# EAGLE board chargerDischarger.V6 (EAGLE 9.5.1)
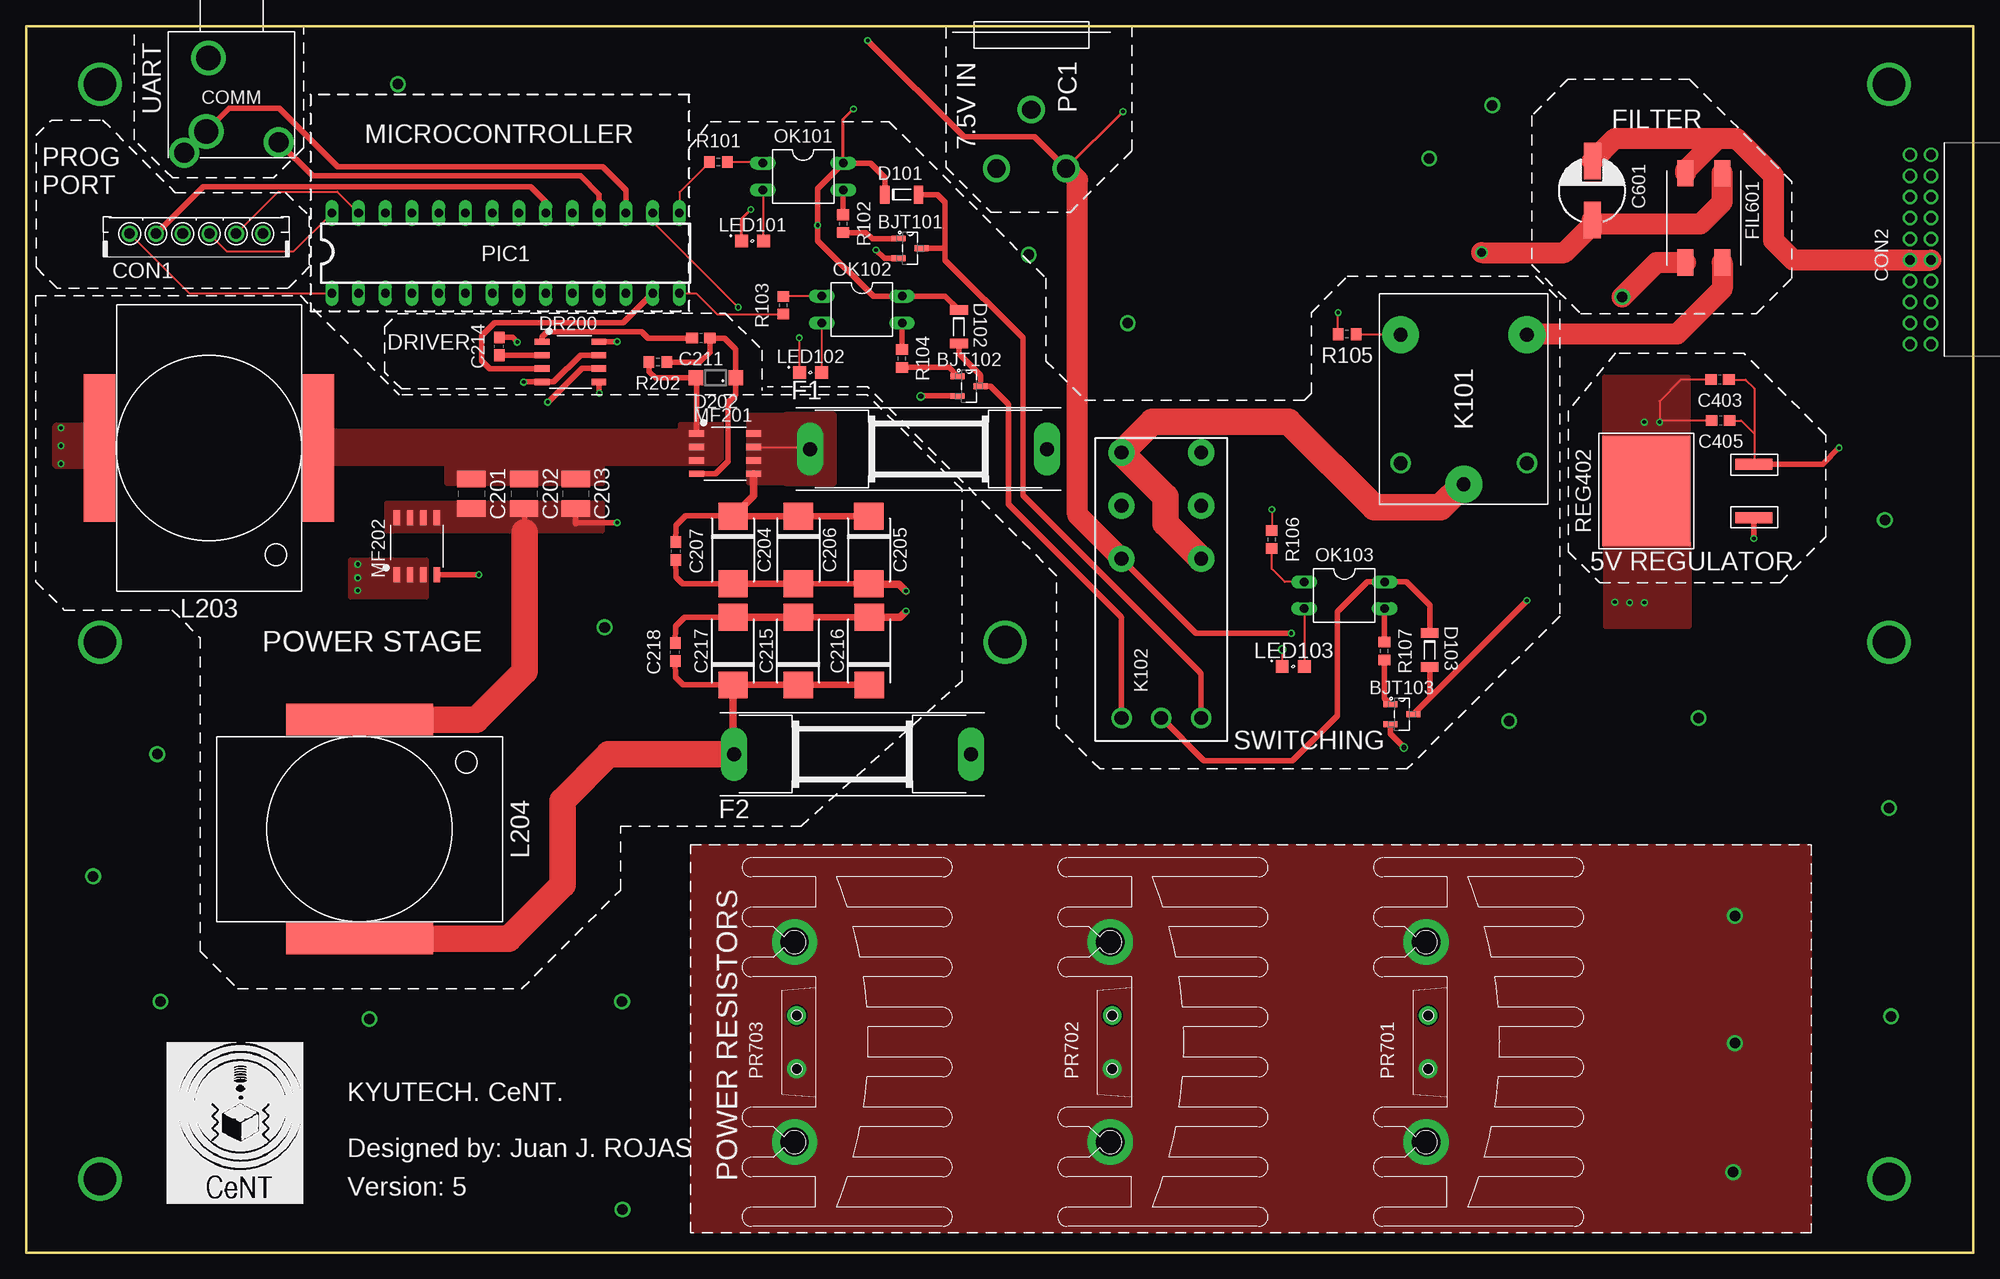
[diagram p0: board, top side]
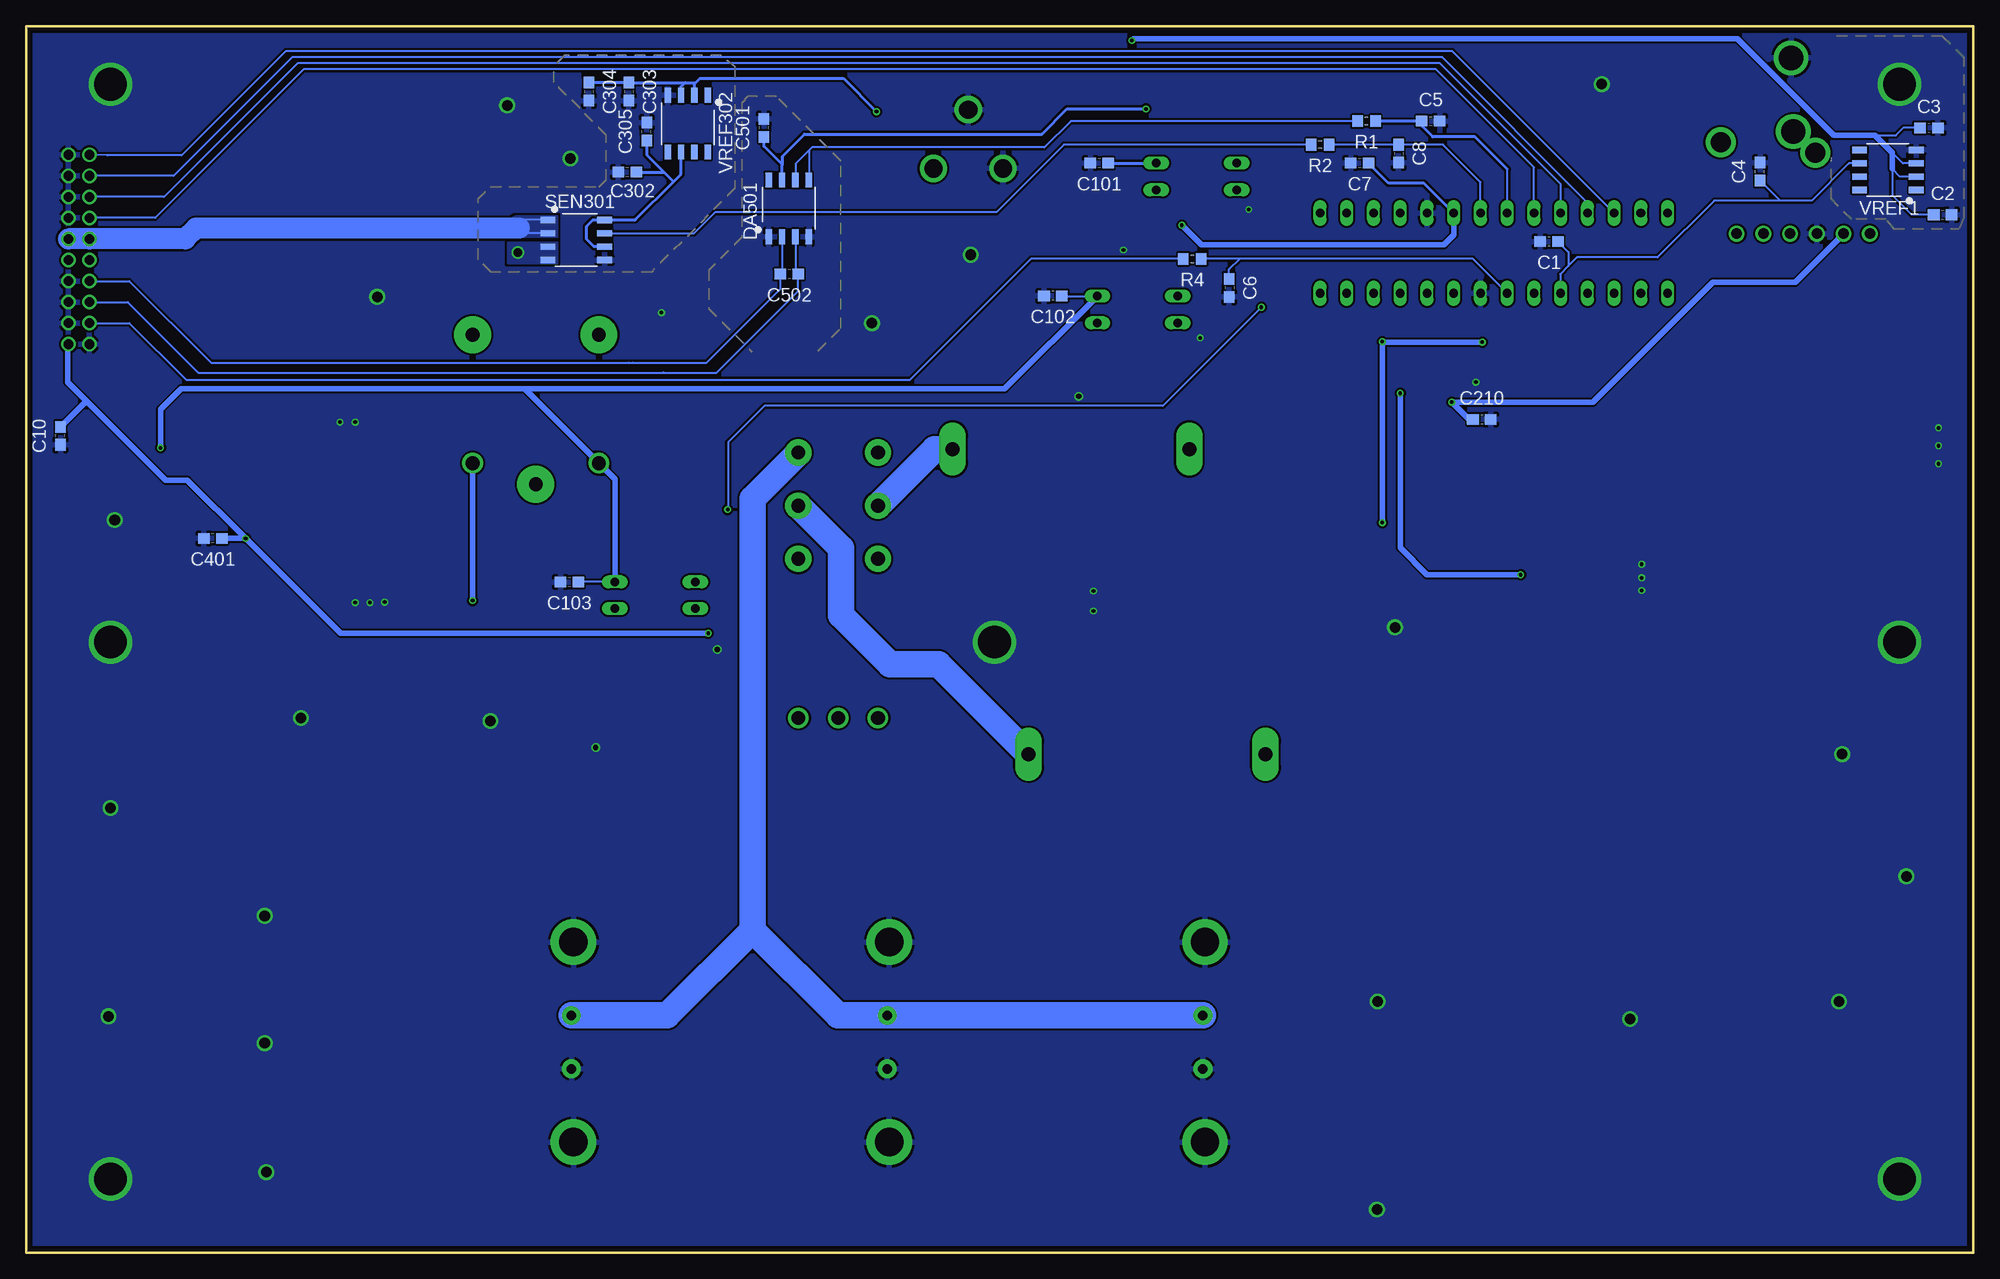
[diagram p1: board, bottom side, seen from below]

Size 185 x 116.5 mm. Coordinates in mm from the lower left corner, seen from the top.
Outline: 185,116.5 0,116.5 0,0 185,0 185,116.5
Copper layers (1*16): Top 0.035mm / dielectric 1.53mm / Bottom 0.035mm
Design rules "pban_5mil-l2": minimum track width 5mil, minimum drill 0.3mm, track to track 5mil, track to pad 0.229mm, pad to pad 5mil, via to via 5mil, smd to smd 5mil, copper to edge 0.5mm, drill to drill 0.5mm, minimum pad ring 0.15mm, minimum via ring 0.15mm, stop-mask expansion 4mil, vias tented up to drill 0.35mm, thermal gap 10mil

## Footprints (pad centres in the part's own frame; a part is rotated, then mirrored left to right if it is on the bottom)
SOT-23 = smd 1.321 x 0.559: 1 -1.092,0.94; 2 -1.092,-0.94; 3 1.092,0
C0603 = smd 1.1 x 1: 1 -0.85,0; 2 0.85,0
C1210 = smd 1.6 x 2.7: 1 -1.4,0; 2 1.4,0
C7343 = smd 2.55 x 2.77: + -3.22,0; - 3.22,0
D6.3_AEC = smd 1.6 x 3.5: NEG 0,-2.8; POS 0,2.8
KLBR4 = drill 2.3 pad 2.9: B -2.4,-9.5 | drill 1.9 pad 2.5: R -4.5,-11.5 | drill 2.3: S -2.2,-2.5 | drill 1.9: T 4.5,-10.5
B6B-EH-A = drill 1: 1 -6.33,0; 2 -3.83,0; 3 -1.29,0; 4 1.25,0; 5 3.79,0; 6 6.33,0
SQT-110-01-F-D-RA = drill 0.914 pad 1.372: 1 9,-1; 2 9,1; 3 7,-1; 4 7,1; 5 5,-1; 6 5,1; 7 3,-1; 8 3,1; 9 1,-1; 10 1,1; 11 -1,-1; 12 -1,1; 13 -3,-1; 14 -3,1; 15 -5,-1; 16 -5,1; 17 -7,-1; 18 -7,1; 19 -9,-1; 20 -9,1
SOD08 = smd 0.9 x 1.7: A 1.6,0; C -1.6,0
SOD123 = smd 1.4 x 1.4: A 1.9,0; C -1.9,0
SOIC-8 = smd 0.6 x 1.4: 1 -1.905,-2.7; 2 -0.635,-2.7; 3 0.635,-2.7; 4 1.905,-2.7; 5 1.905,2.7; 6 0.635,2.7; 7 -0.635,2.7; 8 -1.905,2.7
SH22,5 = drill 1.321 pad 2.54 long: 1 -11.252,0; 2 11.252,0
ACM9070-701 = smd 2.5 x 1.5: P$1 -4.25,1.75; P$2 -4.25,-1.75; P$3 4.25,-1.75; P$4 4.25,1.75
ORWH-SS-105D1F = drill 1.3: B1 -6.1,6; B2 -6.1,-6 | drill 1.3 pad 3.5: COM -8.1,0; NC 6.1,6; NO 6.1,-6
RT424F05 = drill 1.3 pad 2.5: 11 7.56,-3.78; 12 2.52,-3.78; 14 12.6,-3.78; 21 7.56,3.78; 22 2.52,3.78; 24 12.6,3.78 | drill 1.3: A1 -12.6,-3.78; A2 -12.6,3.78; A3 -12.6,0
60B683C = smd 3 x 14: 1 -10.4,0; 2 10.4,0
SML0805 = smd 1.2 x 1.2: A 1.05,0; C -1.05,0
DIL04 = drill 0.813 long: 1 -1.27,-3.81; 2 1.27,-3.81; 3 1.27,3.81; 4 -1.27,3.81
722RA = drill 1.727: PIN 0,3.302; SLEEVE -5.588,0; SLEEVE_SHUNT 0,-3.302
SPDIP-28 = drill 0.813 long: 1 -3.81,16.51; 2 -3.81,13.97; 3 -3.81,11.43; 4 -3.81,8.89; 5 -3.81,6.35; 6 -3.81,3.81; 7 -3.81,1.27; 8 -3.81,-1.27; 9 -3.81,-3.81; 10 -3.81,-6.35; 11 -3.81,-8.89; 12 -3.81,-11.43; 13 -3.81,-13.97; 14 -3.81,-16.51; 15 3.81,-16.51; 16 3.81,-13.97; 17 3.81,-11.43; 18 3.81,-8.89; 19 3.81,-6.35; 20 3.81,-3.81; 21 3.81,-1.27; 22 3.81,1.27; 23 3.81,3.81; 24 3.81,6.35; 25 3.81,8.89; 26 3.81,11.43; 27 3.81,13.97; 28 3.81,16.51
TO-220HEATSINK = drill 2.7 pad 4.318: D1 -9.5,7; D2 9.5,7 | drill 0.9 pad 1.778: R1 -2.54,6.8; R2 2.54,6.8
R0603 = smd 1 x 1.1: 1 -0.85,0; 2 0.85,0
D2PAK-3 = smd 1.016 x 3.504: 1 -2.54,-10.213; 3 2.54,-10.213 | smd 10.49 x 8.38: 4 0,0

## Placement (x,y rotation side)
BJT101  BC818K-40  [SOT-23]  83.99,95.4 0 top
BJT102  BC818K-40  [SOT-23]  89.59,82.32 0 top
BJT103  BC818K-40  [SOT-23]  130.7,51.15 0 top
C1  1u  [C0603]  40.3,96.05 180 bottom
C2  10u  [C0603]  2.9,98.6 0 bottom
C3  1u  [C0603]  4.2,106.85 0 bottom
C4  0.1u  [C0603]  20.25,102.7 90 bottom
C5  1n  [C0603]  51.55,107.5 0 bottom
C6  1u  [C0603]  70.7,91.65 270 bottom
C7  1u  [C0603]  58.3,103.5 180 bottom
C8  1n  [C0603]  54.6,104.4 270 bottom
C10  10u  [C0603]  181.75,77.6 90 bottom
C101  1u  [C0603]  83.05,103.5 180 bottom
C102  1u  [C0603]  87.45,90.9 180 bottom
C103  1u  [C0603]  133.4,63.7 180 bottom
C201  10u  [C1210]  42.3,72.1 270 top
C202  10u  [C1210]  47.3,72.1 270 top
C203  10u  [C1210]  52.2,72.1 270 top
C204  33u_Tan  [C7343]  67.15,66.75 270 top
C205  33u_Tan  [C7343]  80.06,66.75 270 top
C206  33u_Tan  [C7343]  73.36,66.75 270 top
C207  0.1u  [C0603]  61.7,66.65 270 top
C210  1u  [C0603]  46.69,79.16 0 bottom
C211  10n  [C0603]  64.11,86.89 180 top
C214  1u  [C0603]  44.95,86.1 90 top
C215  33u_Tan  [C7343]  73.35,57.15 90 top
C216  33u_Tan  [C7343]  80.1,57.15 90 top
C217  33u_Tan  [C7343]  67.15,57.15 90 top
C218  0.1u  [C0603]  61.65,57.05 90 top
C302  1u  [C0603]  127.9,102.65 180 bottom
C303  10u  [C0603]  127.75,110.3 270 bottom
C304  1u  [C0603]  131.55,110.3 270 bottom
C305  0.1u  [C0603]  126.05,106.5 90 bottom
C401  0.33u  [C0603]  167.27,67.86 180 bottom
C403  1u  [C0603]  160.93,82.94 180 top
C405  10u  [C0603]  161,79.05 180 top
C501  0.1u  [C0603]  114.9,106.85 90 bottom
C502  1n  [C0603]  112.5,92.95 180 bottom
C601  100u  [D6.3_AEC]  148.8,100.9 180 top
COMM  AUDIO_JACK-3.5MM  [KLBR4]  19.5,116 0 top
CON1  B6B-EH-A  [B6B-EH-A]  16.15,96.8 0 top
CON2  SQT-110-01-F-D-RA  [SQT-110-01-F-D-RA]  180,95.3 90 top
D101  BAQ133  [SOD08]  83.18,100.51 0 top
D102  BAQ133  [SOD08]  88.61,87.96 270 top
D103  BAQ133  [SOD08]  133.35,57.25 270 top
D202  [SOD123]  65.51,83.12 180 top
DA501  MAX4198  [SOIC-8]  112.55,99.2 0 bottom
DR200  MCP14628-E/SN  [SOIC-8]  51.71,84.62 270 top
F1  4A  [SH22,5]  85.73,76.34 0 top
F2  4A  [SH22,5]  78.5,47.35 0 top
FIL601  ACM9070-701  [ACM9070-701]  159.4,98.3 270 top
K101  ORWH  [ORWH-SS-105D1F]  136.59,81.1 90 top
K102  RT424F05054  [RT424F05]  107.85,63.4 90 top
L203  68µ  [60B683C]  17.37,76.45 180 top
L204  68µ  [60B683C]  31.67,40.23 270 top
LED101  LGR971  [SML0805]  69.01,96.11 0 top
LED102  LGR971  [SML0805]  74.52,83.61 0 top
LED103  LGR971  [SML0805]  120.4,55.7 0 top
MF201  SI4154DY  [SOIC-8]  66.4,75.9 270 top
MF202  SI4154DY  [SOIC-8]  37.11,67.11 0 top
OK101  PS2502-1  [DIL04]  73.81,102.24 270 top
OK102  PS2502-1  [DIL04]  79.41,89.59 270 top
OK103  PS2502-1  [DIL04]  125.25,62.45 270 top
PC1  722RA  [722RA]  95.5,103 270 top
PIC1  PIC16F1786-SPDIP  [SPDIP-28]  45.55,94.95 90 top
PR701  1  [TO-220HEATSINK]  140,20 90 top
PR702  1  [TO-220HEATSINK]  110,20 90 top
PR703  1  [TO-220HEATSINK]  80,20 90 top
R1  0  [R0603]  57.65,107.5 180 bottom
R2  0  [R0603]  62.05,105.25 180 bottom
R4  200  [R0603]  74.2,94.4 180 bottom
R101  1k  [R0603]  65.76,103.6 0 top
R102  510  [R0603]  77.61,97.75 270 top
R103  1k  [R0603]  71.94,90 90 top
R104  510  [R0603]  83.21,84.95 270 top
R105  10M  [R0603]  125.5,87.25 180 top
R106  1k  [R0603]  118.35,67.75 270 top
R107  510  [R0603]  129.05,57.15 270 top
R202  1k  [R0603]  60.01,84.59 180 top
REG402  NCV7805BD2TG  [D2PAK-3]  153.95,72.35 90 top
SEN301  ACS723-05AB-T  [SOIC-8]  132.75,96.2 270 bottom
VREF1  REF195GSZ  [SOIC-8]  8.1,102.85 90 bottom
VREF302  REF195GSZ  [SOIC-8]  122.15,107.25 180 bottom

## Library data of the parts
BJT101-BJT103 DA501 DR200 MF201 MF202 OK101-OK103 PIC1 REG402 SEN301 VREF1 VREF302 = ICs
C1-C8 C10 C101-C103 C201 C203-C207 C210 C211 C214-C218 C302-C305 C401 C403 C405 C501 C502 C601 D101-D103 D202 FIL601 L203 L204 LED101-LED103 PR701-PR703 R1 R2 R4 R101-R107 R202 = Pasives
C202 = Pasives; SPICEPREFIX: C
COMM CON1 CON2 PC1 = Interfaces
F1 F2 = Pasives; MF: SCHURTER; MPN: 0031.8201
K101 = Electromechanical
K102 = Electromechanical; OC_FARNELL: unknown; OC_NEWARK: unknown

## Nets
7.5V: C2.1 C3.1 C10.2 C303.1 C304.1 C401.1 CON2.19 K102.22 PC1.PIN REG402.1 VREF1.2 VREF1.3 VREF302.2 VREF302.3
+5V: C7.1 C101.1 C102.1 C103.1 C210.1 C403.1 C405.1 C501.1 CON1.2 D101.C D102.C D103.C DA501.7 DR200.6 K101.B1 K102.A3 OK101.4 OK102.4 OK103.4 PIC1.20 REG402.3
BI_CURR_MEAS1:N$1: C302.1 C305.1 SEN301.6 SEN301.8 VREF302.6
C1_SW: CON2.8 PIC1.23
C2_SW: CON2.6 PIC1.24
C3_SW: CON2.4 PIC1.25
C4_SW: CON2.2 PIC1.26
CHAR: PIC1.15 R101.1
DISC: PIC1.14 R103.1
GND: BJT101.2 BJT102.2 BJT103.2 C1.2 C2.2 C3.2 C4.2 C5.2 C6.2 C7.2 C8.2 C10.1 C101.2 C102.2 C103.2 C204.- C205.- C206.- C207.2 C210.2 C215.- C216.- C217.- C218.2 C302.2 C303.2 C304.2 C305.2 C401.2 C403.2 C405.2 C501.2 COMM.S CON1.3 CON2.1 CON2.3 CON2.5 CON2.7 CON2.13 CON2.15 CON2.17 CON2.20 DA501.1 DA501.4 DR200.4 DR200.7 FIL601.P$3 L203.2 LED101.C LED102.C LED103.C MF202.1 MF202.2 MF202.3 PC1.SLEEVE PC1.SLEEVE_SHUNT PIC1.8 PIC1.19 PR701.D1 PR701.D2 PR701.R1 PR702.D1 PR702.D2 PR702.R1 PR703.D1 PR703.D2 PR703.R1 R105.2 REG402.4 SEN301.5 VREF1.4 VREF302.4
I_SENS: R2.2 SEN301.7
ICSPCLK: CON1.5 PIC1.27
ICSPDAT: CON1.4 PIC1.28
IN/OUT+: CON2.9 CON2.10 SEN301.1 SEN301.2
IN/OUT-: C601.NEG CON2.11 CON2.12 FIL601.P$2
MCLR: CON1.1 PIC1.1
N$1: C8.1 PIC1.21 R2.1
N$2: C5.1 PIC1.22 R1.1
N$3: C6.1 PIC1.7 R4.1
N$4: C1.1 C4.1 PIC1.5 VREF1.6
N$6: C601.POS FIL601.P$1 SEN301.3 SEN301.4
N$7: FIL601.P$4 K101.NO
N$10: F1.2 K102.21
N$11: F2.2 K102.11
ON/OFF: PIC1.16 R106.1
POWER_RESISTOR: K102.14 PR701.R2 PR702.R2 PR703.R2
PWM: DR200.3 PIC1.13
RX: COMM.B COMM.R PIC1.17
SWITCH1:N$1: BJT101.1 R102.2
SWITCH1:N$2: BJT101.3 D101.A K102.A1
SWITCH1:N$3: LED102.A OK102.2
SWITCH1:N$4: OK102.1 R103.2
SWITCH1:N$5: OK102.3 R104.1
SWITCH1:N$6: BJT102.1 R104.2
SWITCH1:N$7: BJT102.3 D102.A K102.A2
SWITCH1:N$8: K101.NC R105.1
SWITCH1:N$9: LED103.A OK103.2
SWITCH1:N$10: OK103.1 R106.2
SWITCH1:N$11: LED101.A OK101.2
SWITCH1:N$12: OK101.1 R101.2
SWITCH1:N$13: OK101.3 R102.1
SWITCH1:N$14: OK103.3 R107.1
SWITCH1:N$15: BJT103.1 R107.2
SWITCH1:N$16: BJT103.3 D103.A K101.B2
SWITCH1:TEST: K101.COM K102.12 K102.24
T_SENS: CON2.18 R4.2
TX: COMM.T PIC1.18
V_SENS: DA501.5 DA501.6 R1.2
VSE+: C502.1 CON2.16 DA501.3
VSE-: C502.2 CON2.14 DA501.2
ZETA_CONV1:L1_IN1: C201.1 C202.1 C203.1 D202.A L203.1 MF201.1 MF201.2 MF201.3 R202.2
ZETA_CONV1:L2_IN1: C201.2 C202.2 C203.2 C214.2 DR200.8 L204.1 MF202.5 MF202.6 MF202.7 MF202.8
ZETA_CONV1:N$10: DR200.5 MF202.4
ZETA_CONV1:N$28: C214.1 DR200.2
ZETA_CONV1:N$29: C211.2 DR200.1
ZETA_CONV1:N$30: C211.1 D202.C MF201.4 R202.1
ZETA_IN: C204.+ C205.+ C206.+ C207.1 F1.1 MF201.5 MF201.6 MF201.7 MF201.8
ZETA_OUT: C215.+ C216.+ C217.+ C218.1 F2.1 L204.2

## Tracks (layer width: path | path; a pad name or v marks a point on that pad's centre or on a via)
7.5V  (via drill 0.35)
  Top 0.3: PC1.PIN v104.2,108.4
  Top 0.5: v164.15,67.85 164.16,67.86 REG402.1 | K102.22 111.14,58.85 v120.2,58.85 | PC1.PIN 95.8,106 89.1,106 v79.95,115.15
  Top 2: K102.22 99.9,70.09 99.9,101.9 PC1.PIN
  Bottom 0.2: 9.35,106.15 7.35,106.15 6.65,106.85 C3.1 | 7.7,104.5 6.68,103.48 VREF1.3 | C2.1 5.85,98.6 7.7,100.45 7.7,102.95 6.96,102.22 VREF1.2
  Bottom 0.3: VREF302.2 121.52,111.03 121.4,111.15 | v104.2,108.4 107.35,111.55 121,111.55 121.4,111.15 | 122.4,111.15 C303.1 C304.1 | 122.4,111.15 121.4,111.15 | VREF302.3 122.78,110.77 122.4,111.15
  Bottom 0.5: v164.15,67.85 155.15,58.85 v120.2,58.85 | v164.15,67.85 C401.1 | 7.7,102.95 7.7,104.5 9.35,106.15 13.25,106.15 22.4,115.3 79.8,115.3 v79.95,115.15 | v164.15,67.85 169.7,73.4 171.75,73.4 179.35,81 | 179.35,81 181.05,82.7 181.05,86.25 CON2.19 | C10.2 179.35,80.85 179.35,81
+5V  (via drill 0.35)
  Top 0.2: C405.1 162.95,79.05 164.2,77.8 | 164.2,77.8 164.2,74.93 REG402.3 | 164.2,77.8 164.2,82.1 163.36,82.94 C403.1
  Top 0.3: OK101.4 77.62,107.67 v78.6,108.65
  Top 0.5: DR200.6 54.4,84 52.8,84 49.6,80.8 v49.55,80.8 | D101.C 81.58,102.12 80.2,103.5 OK101.4 75.2,101.09 v75.2,97.6 75.2,96.15 80.49,90.86 OK102.4 87.31,90.86 D102.C | D103.C 133.35,61.52 131.15,63.72 OK103.4 127.42,63.72 124.6,60.9 124.6,51.02 120.3,46.73 111.92,46.73 K102.A3 | REG402.3 170.69,74.89 v172.25,76.45 | PIC1.20 49.36,99.84 47.92,101.28 16.8,101.28 CON1.2
  Bottom 0.2: OK101.4 | 86.5,90.86 OK102.4 | OK103.4 132.53,63.72 C103.1
  Bottom 0.3: C101.1 OK101.4 | DA501.7 113.19,103.31 113.15,103.35 | 113.15,103.35 113.15,104.15 111.05,106.25 88.5,106.25 86.1,108.65 v78.6,108.65 | 113.15,103.35 114.9,105.1 C501.1 | PIC1.20 52.2,101.6 55.55,101.6 C7.1
  Bottom 0.5: v172.25,76.45 172.25,80.1 170.3,82.05 137.64,82.05 | 137.64,82.05 K101.B1 129.06,73.47 OK103.4 | C102.1 arc-45 86.5,90.86 | CON1.2 16.92,92.2 24.75,92.2 36.15,80.8 v49.55,80.8 47.91,79.16 C210.1 | PIC1.20 49.36,96.69 50.3,95.75 73.35,95.75 v75.2,97.6 | OK102.4 92.03,82.05 137.64,82.05
BI_CURR_MEAS1:N$1
  Bottom 0.3: 123.5,101.75 127.14,98.11 SEN301.8 131.15,98.11 131.75,97.5 131.75,96.25 131.06,95.56 SEN301.6 | 123.5,101.75 122.8,102.45 122.8,104.53 | C305.1 126.05,104.3 124.4,102.65 | 124.4,102.65 123.5,101.75 | C302.1 124.4,102.65
  Bottom 0.5: 122.8,104.53 VREF302.6
C1_SW
  Bottom 0.2: PIC1.23 41.74,103.09 51.05,112.4 158.65,112.4 172.75,98.3 CON2.8
C2_SW
  Bottom 0.2: PIC1.24 39.2,101.5 50.7,113 159.2,113 171.9,100.3 CON2.6
C3_SW
  Bottom 0.2: PIC1.25 36.66,99.76 50.45,113.55 159.75,113.55 171,102.3 CON2.4
C4_SW
  Bottom 0.2: PIC1.26 49.51,114.15 160.35,114.15 170.25,104.25 177.3,104.25 CON2.2
CHAR
  Top 0.2: R101.1 62.06,100.75 PIC1.15
DISC
  Top 0.2: PIC1.14 63.66,91.14 65.65,89.15 R103.1
GND  (via drill 0.35, 0.5, 1, 3.1)
  Top 0.2: LED102.C 73.47,86.88 v73.45,86.9 | LED103.C v119.35,57.3 | C405.2 155.35,79.05 v155.2,78.9 155.2,80.9 157.24,82.94 C403.2 | R105.2 v124.65,89.3
  Top 0.3: LED101.C 67.96,98.21 v68.85,99.1
  Top 0.5: BJT101.2 81.54,94.46 v80.75,95.25 | C205.- 80.07,63.51 80.05,63.53 C206.- | C207.2 61.75,64.15 62.37,63.53 C204.- | C218.2 61.7,59.5 62.57,60.37 C217.- | DR200.7 52.66,85.25 50.12,82.72 DR200.4 47.27,82.72 v47.25,82.7 | BJT102.2 85.03,81.38 v85,81.35 | BJT103.2 129.61,49.29 v130.9,48
  Top 0.6: C215.- C216.- | C204.- C206.-
  Top 0.7: C215.- C217.- | v83.6,60.95 83.02,60.37 C216.- | v83.6,62.85 82.94,63.51 80.07,63.51
  Top 2: FIL601.P$3 154.9,94.05 v151.65,90.8
  other vias: 153.75,78.9 31.5,65.4 31.5,64.1 31.5,62.9 3.3,76.65 3.3,78.35 3.3,74.95 177,58 7,58 7,111 7,7 95.25,94.8 177,111 93,58 177,7 150.95,61.8 152.35,61.75 153.75,61.75 133.3,103.95 139.3,109 104.65,88.3 140.9,50.5 158.9,50.8 162.35,32 162.35,19.9 162.2,7.65 56.6,23.85 32.6,22.2 56.65,4.1 6.35,35.75 12.45,47.35 12.75,23.85 35.3,111 176.6,69.6 54.95,59.4 177,42.25 177.2,22.45
  pour Bottom (isolate 0.2, rank 2): 0,116.5 185,116.5 185,0 0,0
  pour Top (no thermals): 157.9,83.15 150,83.15 arc1 150,75.3 arc0 157.9,75.3
  pour Top (no thermals): 38,65.8 30.8,65.8 30.8,62.3 38,62.3
  pour Top (no thermals): 2.95,78.35 6.6,78.35 6.6,74.95 2.95,74.95
  pour Top (no thermals): 158,67.35 150.1,67.35 arc1 150.1,59.5 arc0 158,59.5
  pour Top (no thermals): 63.1,38.75 169.6,38.75 169.6,1.9 63.1,1.9
I_SENS
  Bottom 0.2: SEN301.7 121.56,96.83 119.55,98.85 92.8,98.85 86.4,105.25 R2.2
ICSPCLK
  Top 0.2: CON1.5 23.94,100.8 29.54,100.8 PIC1.27
ICSPDAT
  Top 0.2: PIC1.28 25.38,95.1 19.1,95.1 CON1.4
IN/OUT+
  Bottom 0.2: SEN301.1 137.69,98.11 arc-90 138.15,97.65 138.15,97.33 arc-90 137.65,96.83 SEN301.2
  Bottom 2: 138.15,97.33 168.87,97.33 169.9,96.3 CON2.10 CON2.9
  pour Bottom (no thermals): 134.55,98.5 134.55,96.45 138.2,96.45 arc90 139.2,97.45 139.2,97.5 arc90 138.2,98.5
IN/OUT-
  Top 2: 160.71,105.85 157.65,102.79 FIL601.P$2 | C601.NEG 150.95,105.85 160.71,105.85 | 160.71,105.85 162.5,105.85 166.05,102.3 166.05,96.15 167.9,94.3 CON2.12 CON2.11
MCLR
  Top 0.2: CON1.1 15.48,91.14 PIC1.1
N$1
  Bottom 0.2: PIC1.21 46.82,101.7 50.37,105.25 C8.1 R2.1
N$2
  Bottom 0.2: PIC1.22 44.28,102.93
  Bottom 0.3: 44.28,102.93 47.35,106 51.35,106 52.4,107.05 C5.1 R1.1
N$3
  Bottom 0.2: PIC1.7 47.54,94.4 69.7,94.4 | 69.7,94.4 R4.1 | C6.1 70.7,93.4 69.7,94.4
N$4
  Bottom 0.2: 18.35,99.95 15.35,99.95 11.81,103.48 VREF1.6 | 18.35,99.95 24.6,99.95 30,94.55 37.65,94.55 38.45,93.75 | 38.45,93.75 39.25,92.95 39.25,91.19 PIC1.5 | C1.1 38.45,95.05 38.45,93.75 | C4.1 18.35,99.95
N$6  (via drill 0.8)
  Top 2: FIL601.P$1 161.15,99.8 159.05,97.7 149.2,97.7 C601.POS 148.8,97.65 146.15,95 v138.3,95
  pour Bottom (no thermals): 134.55,96 134.55,93.95 139.2,93.95 139.2,96
N$7
  Top 2: FIL601.P$4 161.15,91.55 156.85,87.25 142.64,87.25 K101.NO
N$10
  Bottom 2.5: F1.2 98.69,76.34 K102.21
N$11
  Bottom 2.5: F2.2 98.3,55.9 102.95,55.9 107.6,60.55 107.6,66.93 K102.11
ON/OFF  (via drill 0.35)
  Top 0.2: v118.35,70.6 R106.1 | v67.65,89.8 59.52,97.93 PIC1.16
  Bottom 0.2: v118.35,70.6 arc-45 118.3,70.72 118.3,77 114.85,80.45 77,80.45 v67.65,89.8
POWER_RESISTOR
  Bottom 2.5: K102.14 116,71.63 116,30.65 | PR701.R2 124.11,22.54 116,30.65 | PR703.R2 PR702.R2 107.89,22.54 116,30.65
PWM
  Top 0.5: DR200.3 44.02,83.98 43.25,84.75 43.25,87.1 44.5,88.35 56.73,88.35 PIC1.13
RX
  Top 0.5: PIC1.17 56.98,100.92 54.75,103.15 29.6,103.15 24.05,108.7 19.3,108.7 COMM.B 15.1,104.5 COMM.R
SWITCH1:N$1
  Top 0.5: R102.2 79.8,96.9 80.4,96.3 82.36,96.3 BJT101.1
SWITCH1:N$2
  Top 0.5: 87.3,95.4 BJT101.3 | D101.A 86.59,100.51 87.3,99.8 87.3,95.4 | K102.A1 111.63,54.81 arc45 111.48,55.17 94.7,71.95 94.7,86.9 87.3,94.3 87.3,95.4
SWITCH1:N$3
  Top 0.2: LED102.A 75.6,83.64 OK102.2
SWITCH1:N$4
  Top 0.2: OK102.1 R103.2
SWITCH1:N$5
  Top 0.5: OK102.3 R104.1
SWITCH1:N$6
  Top 0.5: R104.2 87.66,84.1 BJT102.1
SWITCH1:N$7
  Top 0.5: D102.A 88.61,85.4 90.68,83.33 BJT102.3 91.63,82.32 93.2,80.75 arc-45 93.35,80.39 93.35,71.1 103.92,60.53 arc-45 104.07,60.17 K102.A2
SWITCH1:N$8
  Top 0.2: R105.1 130.54,87.25 K101.NC
SWITCH1:N$9
  Top 0.2: OK103.2 LED103.A
SWITCH1:N$10
  Top 0.2: OK103.1 119.58,63.72 118.35,64.95 R106.2
SWITCH1:N$11
  Top 0.2: OK101.2 70,96.17
  Top 0.5: 70,96.17 LED101.A
SWITCH1:N$12
  Top 0.2: OK101.1 69.91,103.6 R101.2
SWITCH1:N$13
  Top 0.5: R102.1 OK101.3
SWITCH1:N$14
  Top 0.5: R107.1 OK103.3
SWITCH1:N$15
  Top 0.5: BJT103.1 129.05,52.65 R107.2
SWITCH1:N$16  (via drill 0.35)
  Top 0.5: BJT103.3 133.35,52.71 | 133.35,52.71 D103.A | v142.59,61.95 133.35,52.71
  Bottom 0.5: K101.B2 v142.59,61.95
SWITCH1:TEST
  Top 2.5: K101.COM 134.39,70.8 128.1,70.8 119.95,78.95 107.02,78.95 K102.24 108.25,71.82 108.25,69.3 K102.12
T_SENS
  Bottom 0.2: R4.2 89.55,94.4 101.05,82.9 169.8,82.9 175.2,88.3 CON2.18
TX
  Top 0.5: PIC1.18 54.44,100.51 52.65,102.3 27.2,102.3 COMM.T
V_SENS
  Bottom 0.2: R1.2 85.75,107.5 88.25,105 110.35,105 110.64,104.7 | DA501.6 111.9,101.92 111.9,103.45 110.64,104.7 | 110.64,104.7 DA501.5
VSE+
  Bottom 0.2: CON2.16 175.35,90.3 168.65,83.6 124.5,83.6 124.4,83.6 119.4,83.6 111.65,91.35 C502.1 111.92,93.22 DA501.3
VSE-
  Bottom 0.2: CON2.14 175.2,92.3 167.45,84.55 127.75,84.55 127.35,84.55 120.35,84.55 113.35,91.55 C502.2 113.19,93.11 DA501.2
ZETA_CONV1:L1_IN1
  Top 0.5: MF201.1 63.7,83.03 D202.A 59.78,83.12 59.2,83.7 59.2,84.55 R202.2
  pour Top (no thermals): 62.15,78.65 66.55,78.65 66.55,75 62.15,75
  pour Top (no thermals): 27.89,78.05 62.35,78.1 62.35,75 28,74.95
  pour Top (no thermals): 40,75.1 54.7,75.1 54.7,73.1 40,73.1
ZETA_CONV1:L2_IN1  (via drill 0.35)
  Top 0.5: C202.2 47.35,70.65 47.35,68.45 | DR200.8 56.12,86.53 v56.15,86.55 | v56.15,69.35 52.3,69.35 52.2,69.25 C203.2 | C214.2 46.2,86.95 v46.65,86.5
  Top 2.5: L204.1 42.73,50.63 47.35,55.25 47.35,68.45
  Bottom 0.5: v56.15,69.35 v56.15,86.55 56.1,86.5 v46.65,86.5
  pour Top (no thermals): 34.3,71.2 54.7,71.2 54.7,68.6 34.3,68.6
ZETA_CONV1:N$10  (via drill 0.35)
  Top 0.5: v43,64.4 v42.99,64.41 MF202.4 | DR200.5 54.41,81.69 v54.45,81.65
  Bottom 0.5: v43,64.4 51.9,64.4 54.45,66.95 v54.45,81.65
ZETA_CONV1:N$28
  Top 0.5: C214.1 46.3,85.25 DR200.2
ZETA_CONV1:N$29
  Top 0.5: DR200.1 49,87 49.48,87.47 58.48,87.47 59.06,86.89 C211.2
ZETA_CONV1:N$30
  Top 0.5: MF201.4 65.5,74 66.7,75.2 66.7,80.8 67.4,81.5 D202.C 67.41,85.84 66.36,86.89 C211.1 64.95,85.55 63.99,84.59 R202.1
ZETA_IN
  Top 0.2: MF201.7 74.01,76.53 arc-45 F1.1
  Top 0.5: C206.+ 73.35,69.76 73.14,69.97 | C204.+ 67.13,69.65 66.78,70 62.65,70 61.75,69.1 C207.1
  Top 0.6: C204.+ 73.14,69.97 | C206.+ C205.+
  Top 0.7: C204.+ 69.1,71.92 MF201.5
  pour Top (no thermals): 68.7,79.55 72.15,79.55 72.15,73.15 68.7,73.15
  pour Top (no thermals): 72.3,79.55 76.65,79.55 76.65,73.15 72.3,73.15
ZETA_OUT
  Top 0.5: C218.1 61.7,54.65 62.4,53.95 67.13,53.95 C217.+
  Top 0.6: C217.+ C215.+ C216.+
  Top 0.7: F2.1 67.1,47.5 67.15,47.55 C217.+
  Top 2.5: L204.2 45.83,29.83 50.95,34.95 50.95,42.95 55.35,47.35 F2.1

## Text on the board
tPlace: UART | FILTER | MICROCONTROLLER | 7.5V IN | PROG / PORT | DRIVER | 5V REGULATOR | POWER STAGE | SWITCHING | KYUTECH. CeNT. / / Designed by: Juan J. ROJAS | POWER RESISTORS | Version: 5
bDocu: ADC REF | I SENS | V SENS